# Altium PCB Micro y BT.PcbDoc
Units mil, origin at the board's own origin, x right, y up, seen from the top; angles counter-clockwise.
Board outline 6000 x 4000 mil, 2 copper layers (Top Layer, Bottom Layer); 49 components, 222 nets, 218 pads, 10 vias.
Unrouted connection lines stored in the file: 95.
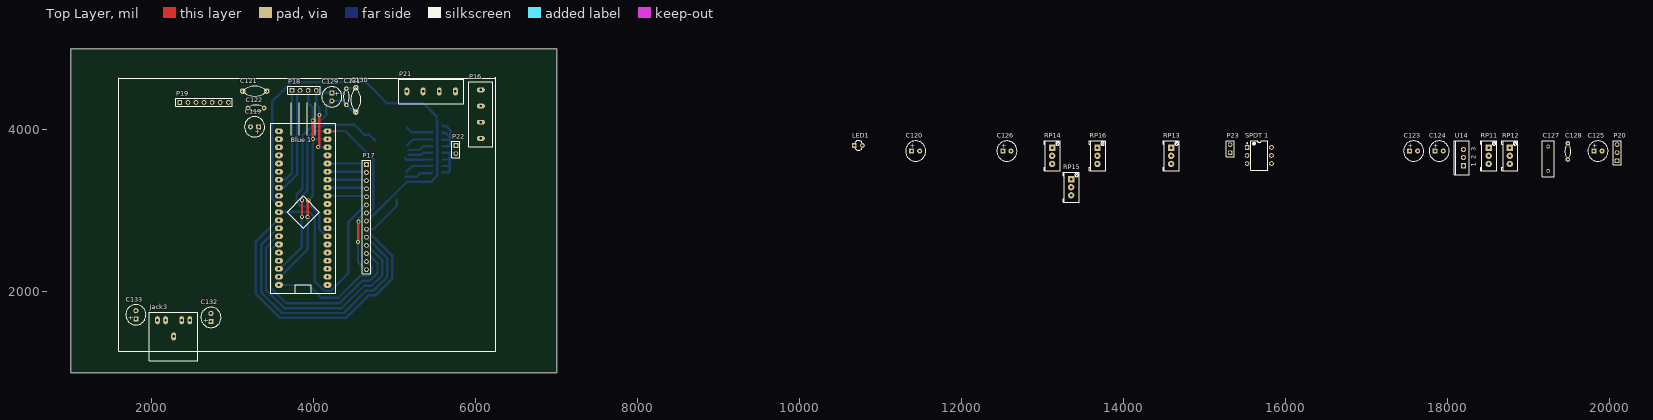
[diagram p0: Top Layer view]
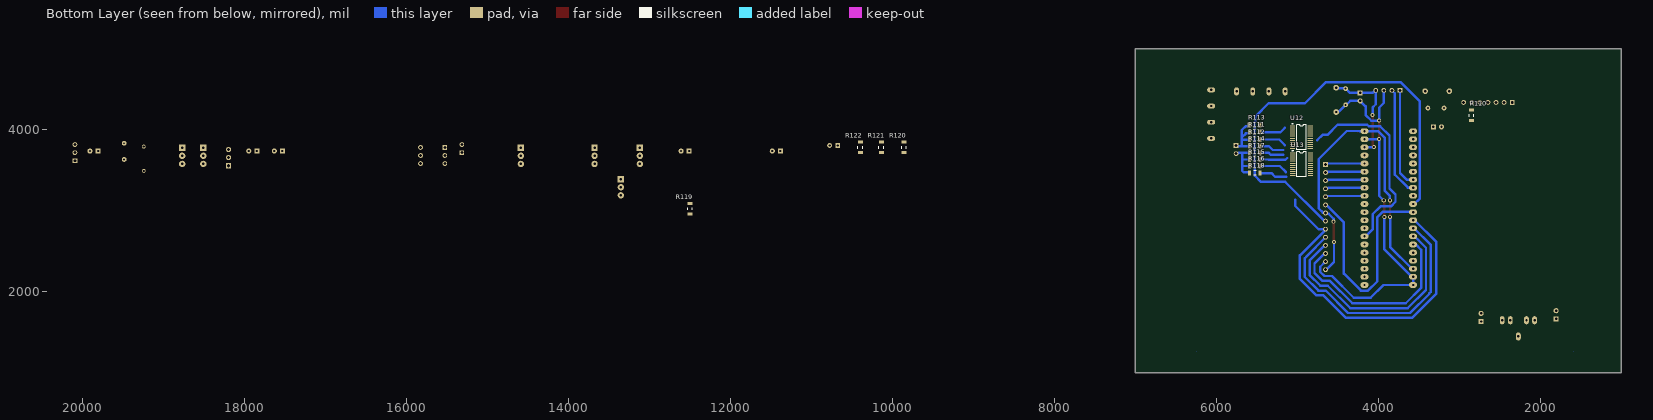
[diagram p1: Bottom Layer view, seen from below]

## Layer stack, top to bottom
Top Solder: solder mask 0.4, Solder Resist, Dk 3.5
Top Layer: signal copper 1.4
Dielectric 1: dielectric 12.6, FR-4, Dk 4.8
Bottom Layer: signal copper 1.4
Bottom Solder: solder mask 0.4, Solder Resist, Dk 3.5

## Board outline
1000,1000 7000,1000 7000,5000 1000,5000

## Design rules (kind name [scope] priority, off if disabled: settings)
Clearance [All] p1: gap=20 ignorepadtopadclearanceinfootprint=TRUE except(0: Arc-Hole Track-Hole SMDPad-Hole THPad-Hole Via-Hole Fill-Hole Poly-Hole Region-Hole Text-Hole; 30: Track-Track)
PolygonConnect [All] p1: connectstyle=Relief reliefconductorwidth=10 reliefentries=4 polygonreliefangle="90 Angle" airgapwidth=10
RoutingLayers RoutingLayers_1 [All] p1: top layer_v5=TRUE bottom layer_v5=TRUE
RoutingLayers [All] p2: top layer_v5=TRUE bottom layer_v5=TRUE
RoutingVias [All] p1: holewidth=28 width=50 viastyle="Through Hole" minholewidth=28 minwidth=50 maxholewidth=28 maxwidth=50
SolderMaskExpansion [All] p1: expansion=4 istentingtop=FALSE
Width [All] p1: maxlimit=30 minlimit=30 preferedwidth=30 minimp=50.000000 maximp=50.000000 favimp=50.000000
29 further rules are at their usual default settings.

## Classes and differential pairs
component class "Micro y BT": "Blue 1" C129 C130 C131 P18
component class Triangular: U4
component class "Positive Pwr": *1
component class "Pasa Banda Superior": C94 C95 C104 C105 C109 C110
component class "Pasa Banda Inferior": C80 C81 C82 C83 C84 C87 C88
component class "Pasa Bajos": C67 C68 C69 C72
component class "Pasa Altos": C59 C60 C61 C62 C65 C66
component class "Negative Pwr": *2

## Components (designator, comment, footprint, x,y, rotation, side; value= is the part's Value field where it differs from the comment)
"Blue 1" "Bluepill" Bluepill 3870,2984 r0 top
C119 "Cap Pol1" "CAPR D250 H450 R100 mil" 3269,4037 r180 top value=10uF
C120 "Cap Pol1" "CAPR D250 H450 R100 mil" 11434,3738 r0 top value=10uF
C121 "Cap" "cap 3" 3271,4478 r0 top value=10nF
C122 "Cap" "CAP DISCO 200mil" 3287,4269 r0 top value=100nF
C123 "Cap Pol1" "CAPR D250 H450 R100 mil" 17584,3738 r0 top value=10uF
C124 "Cap Pol1" "CAPR D250 H450 R100 mil" 17900,3738 r0 top value=10uF
C125 "Cap Pol1" "CAPR D250 H450 R100 mil" 19861,3738 r0 top value=10uF
C126 "Cap Pol1" "CAPR D250 H450 R100 mil" 12561,3738 r0 top value=10uF
C127 "Cap" RAD-0.3 19246,3643 r90 top value=10nF
C128 "Cap" "CAP DISCO 200mil" 19489,3734 r90 top value=100nF
C129 "Cap Pol1" "CAPR D250 H450 R100 mil" 4223,4407 r270 top value=10uF
C130 "Cap" "cap 3" 4520,4370 r90 top value=10nF
C131 "Cap" "CAP DISCO 200mil" 4402,4409 r90 top value=100nF
C132 "Cap Pol1" "CAPR D250 H450 R100 mil" 2730,1683 r90 top value=10uF
C133 "Cap Pol1" "CAPR D250 H450 R100 mil" 1803,1716 r90 top value=10uF
Jack3 "Jack 3.5mm" "jack 3.5mm" 2469,1648 r180 top
LED1 "Diodo Led" "Led 3mm AMARILLO" 10726,3807 r0 top
P16 "Filter In" "Bornera 4" 6063,4494 r270 top
P17 "Pantalla" HDR1X14 4651,3573 r270 top
P18 "Bluetooth Serial" HDR1X4 3731,4488 r0 top
P19 "Bluetooth Audio" HDR1X7 2345,4339 r0 top
P20 "Power" HDR1X3 20097,3618 r90 top
P21 "Filter In" "Bornera 4" 5150,4475 r0 top
P22 "Header 2" HDR1X2 5755,3806 r270 top
P23 "Filter Out" HDR1X2 15318,3718 r90 top
R110 "Res2" "1206 resistor" 2848,4178 r90 bottom value=1K
R111 "Res SMD" "1206 resistor" 5525,3969 r0 bottom
R112 "Res SMD" "1206 resistor" 5526,3879 r0 bottom
R113 "Res SMD" "1206 resistor" 5527,4057 r0 bottom
R114 "Res SMD" "1206 resistor" 5525,3796 r0 bottom
R115 "Res SMD" "1206 resistor" 5524,3632 r0 bottom
R116 "Res SMD" "1206 resistor" 5524,3551 r0 bottom
R117 "Res SMD" "1206 resistor" 5524,3713 r0 bottom
R118 "Res SMD" "1206 resistor" 5523,3467 r0 bottom
R119 "Res2" "1206 resistor" 12503,3024 r90 bottom value=47K
R120 "Res2" "1206 resistor" 9859,3782 r90 bottom value=47K
R121 "Res2" "1206 resistor" 10139,3782 r90 bottom value=47K
R122 "Res2" "1206 resistor" 10399,3782 r90 bottom value=47K
RP11 "Trimpot" "Trimpot Multivuelta Vertical" 18511,3679 r90 top
RP12 "Trimpot" "Trimpot Multivuelta Vertical" 18772,3679 r90 top
RP13 "Trimpot" "Trimpot Multivuelta Vertical" 14589,3679 r90 top
RP14 "Trimpot" "Trimpot Multivuelta Vertical" 13119,3679 r90 top
RP15 "Trimpot" "Trimpot Multivuelta Vertical" 13354,3291 r90 top
RP16 "Trimpot" "Trimpot Multivuelta Vertical" 13679,3679 r90 top
"SPDT 1" "SPDT on off" DIP-6 15678,3683 r0 top
U12 "AD5206" 948H-01 4948.25,3908.2 r270 bottom
U13 "AD5206" 948H-01 4947.25,3573.98 r270 bottom
U14 "LM7805" TO-220_FullPak 18199,3657 r90 top

## Footprints (in the part's own frame and the unit in brackets; to place one, negate y for a bottom-side part, rotate by r counter-clockwise, add the part's x,y. Pads: shape width x height; smd on the part's side, far side on the other; paste and mask are expansions set on the pad)
948H-01 [mm] "Shrink Small Outline; 24 Leads; Body Width 4.4 mm; Pitch 0.65 mm"
  rect 0.3x1.65 smd: 1(-3.575,-2.775) 2(-2.925,-2.775) 3(-2.275,-2.775) 4(-1.625,-2.775) 5(-0.975,-2.775) 6(-0.325,-2.775) 7(0.325,-2.775) 8(0.975,-2.775) 9(1.625,-2.775) 10(2.275,-2.775) 11(2.925,-2.775) 12(3.575,-2.775) 13(3.575,2.775) 14(2.925,2.775) 15(2.275,2.775) 16(1.625,2.775) 17(0.975,2.775) 18(0.325,2.775) 19(-0.325,2.775) 20(-0.975,2.775) 21(-1.625,2.775) 22(-2.275,2.775) 23(-2.925,2.775) 24(-3.575,2.775)
  silkscreen extent -4.4,-2.9 3.95,1.55
"1206 resistor" [mil]
  rect 39x61 smd: 1(-63,-2) 2(66,-2)
  silkscreen extent -14,-30 16,27
Bluepill [mil]
  oval 100x70 hole 30: 1(-300,1000) 2(-300,900) 3(-300,800) 4(-300,700) 5(-300,600) 6(-300,500) 7(-300,400) 8(-300,300) 9(-300,200) 10(-300,100) 11(-300,0) 12(-300,-100) 13(-300,-200) 14(-300,-300) 15(-300,-400) 16(-300,-500) 17(-300,-600) 18(-300,-700) 19(-300,-800) 20(-300,-900) 21(300,-900) 22(300,-800) 23(300,-700) 24(300,-600) 25(300,-500) 26(300,-400) 27(300,-300) 28(300,-200) 29(300,-100) 30(300,0) 31(300,100) 32(300,200) 33(300,300) 34(300,400) 35(300,500) 36(300,600) 37(300,700) 38(300,800) 39(300,900) 40(300,1000)
  silkscreen extent -400,-1000 400,1350
"Bornera 4" [mil]
  oval 60x100 hole 30: 1(0,0) 2(200,0) 3(400,0) 4(600,0)
  silkscreen extent -100,-150 700,150
"cap 3" [mil]
  round 70 hole 30: 1(-150,0) 2(150,0)
  silkscreen extent -150,-62 150,62
"CAP DISCO 200mil" [mm] "Capacitor; 2 Leads"
  round 1.5 hole 0.6: 1(-2.54,0) 2(2.54,0)
  silkscreen extent -1.74,-0.93 1.74,0.93, body extent -3.5,-0.85 3.49,0.85, height 7.5
"CAPR D250 H450 R100 mil" [mm]
  rect 1.6x1.6 hole 0.75: 1(-1.27,0)
  round 1.6 hole 0.75: 2(1.27,0)
  silkscreen extent -3.17,-3.17 3.17,3.17, body extent -3.4,-3.39 3.37,3.39, height 2.49
DIP-6 [mm] "DIP; 6 Leads; Row Spacing 7.62 mm; Pitch 2.54 mm"
  rect 1.5x1.5 hole 0.9: 1(-3.81,2.54)
  round 1.5 hole 0.9: 2(-3.81,0) 3(-3.81,-2.54) 4(3.81,-2.54) 5(3.81,0) 6(3.81,2.54)
  silkscreen extent -3.93,-4.7 2.65,4.7, body extent -3.55,-4.7 3.55,4.7, height 5.46
HDR1X2 [mm] "Connector; Header; 2 Position"
  rect 1.5x1.5 hole 0.9: 1(0,0)
  round 1.5 hole 0.9: 2(2.54,0)
  silkscreen extent -1.27,-1.27 3.81,1.27
HDR1X3 [mm] "Connector; Header; 3 Position"
  rect 1.5x1.5 hole 0.9: 1(0,0)
  round 1.5 hole 0.9: 2(2.54,0) 3(5.08,0)
  silkscreen extent -1.27,-1.27 6.35,1.27
HDR1X4 [mm] "Connector; Header; 4 Position"
  rect 1.5x1.5 hole 0.9: 1(0,0)
  round 1.5 hole 0.9: 2(2.54,0) 3(5.08,0) 4(7.62,0)
  silkscreen extent -1.27,-1.27 8.89,1.27
HDR1X7 [mm] "Connector; Header; 7 Position"
  rect 1.5x1.5 hole 0.9: 1(0,0)
  round 1.5 hole 0.9: 2(2.54,0) 3(5.08,0) 4(7.62,0) 5(10.16,0) 6(12.7,0) 7(15.24,0)
  silkscreen extent -1.27,-1.27 16.51,1.27
HDR1X14 [mm] "Connector; Header; 14 Position"
  rect 1.5x1.5 hole 0.9: 1(0,0)
  round 1.5 hole 0.9: 2(2.54,0) 3(5.08,0) 4(7.62,0) 5(10.16,0) 6(12.7,0) 7(15.24,0) 8(17.78,0) 9(20.32,0) 10(22.86,0) 11(25.4,0) 12(27.94,0) 13(30.48,0) 14(33.02,0)
  silkscreen extent -1.27,-1.27 34.29,1.27
"jack 3.5mm" [mil]
  oval 60x100 hole 30: 1(0,0) 1(100,0) 2(300,0) 2(400,0) 3(200,200)
  Top Layer region: 400,400
  silkscreen extent -100,-100 500,500
"Led 3mm AMARILLO" [mm]
  rect 1.5x1.5 hole 0.75: 1(-1.27,0)
  round 1.5 hole 0.75: 2(1.27,0)
  silkscreen extent -1.18,-1.5 1,1.5, body extent -1.65,-1.65 1.65,1.64, height 5.51
RAD-0.3 [mm] "Radial Cap, Thru-Hole; 2 Leads; 0.3 in Pin Spacing"
  round 1.2 hole 0.7: 1(-3.81,0) 2(3.81,0)
  silkscreen extent -5.71,-1.91 5.71,1.91
TO-220_FullPak [mm] "TO, Thru-Hole, Vertical, Heatsink Mounted; 3 In-Line Leads; Pitch 2.54 mm"
  rect 1.6x1.6 hole 1: 1(-2.54,0)
  round 1.6 hole 1: 2(0,0) 3(2.54,0)
  silkscreen extent -5.35,-1.85 5.35,2.85
"Trimpot Multivuelta Vertical" [mm] "Preset Multivuelta de ajuste vertical"
  rect 2x2 hole 0.75: 1(2.54,0)
  round 2 hole 0.75: 2(-2.54,0) 3(0,0)
  silkscreen extent -4.75,-2.54 4.75,2.54, body extent -4.6,-2.41 4.6,2.39, height 12.06

## Part data
C119 C120 C123 C124 C125 C126 C129 C132 C133: "Polarized Capacitor (Radial)", LatestRevisionDate=17-Jul-2002, LatestRevisionNote="Re-released for DXP Platform.", PackageDescription="Polarized Capacitor (Radial); 2 Leads", PackageReference=RB7.6-15, Published=8-Jun-2000, Publisher="Altium Limited"
C121 C122 C127 C128 C130 C131: "Capacitor", LatestRevisionDate=17-Jul-2002, LatestRevisionNote="Re-released for DXP Platform.", PackageDescription="Radial Cap, Thru-Hole; 2 Leads; 0.3 in Pin Spacing", PackageReference=RAD-0.3, Published=8-Jun-2000, Publisher="Altium Limited"
LED1: "Led 3mm", FABRICANTE=Generico, VALOR="Led Xmm (COLOR)"
P16 P18 P21: library part MHDR1X4, "Header, 4-Pin", LatestRevisionDate=17-Jul-2002, LatestRevisionNote="Re-released for DXP Platform.", Publisher="Altium Limited"
P17: library part "Header 14", "Header, 14-Pin", LatestRevisionDate=17-Jul-2002, LatestRevisionNote="Re-released for DXP Platform.", Publisher="Altium Limited"
P19: library part "Header 7", "Header, 7-Pin", LatestRevisionDate=17-Jul-2002, LatestRevisionNote="Re-released for DXP Platform.", Publisher="Altium Limited"
P20: library part "Header 3", "Header, 3-Pin", LatestRevisionDate=17-Jul-2002, LatestRevisionNote="Re-released for DXP Platform.", Publisher="Altium Limited"
P22: "Header, 2-Pin", LatestRevisionDate=17-Jul-2002, LatestRevisionNote="Re-released for DXP Platform.", Publisher="Altium Limited"
P23: library part "Header 2", "Header, 2-Pin", LatestRevisionDate=17-Jul-2002, LatestRevisionNote="Re-released for DXP Platform.", Publisher="Altium Limited"
R110 R119 R120 R121 R122: "Resistor", LatestRevisionDate=17-Jul-2002, LatestRevisionNote="Re-released for DXP Platform.", PackageDescription="Axial Device, Thru-Hole; 2 Leads; 0.4 in Pin Spacing", PackageReference=AXIAL-0.4, Published=8-Jun-2000, Publisher="Altium Limited"
R111 R112 R113 R114 R115 R116 R117 R118: "Res Smd", VALOR=10K
RP11 RP12 RP13 RP14 RP15 RP16: "Preset"
  RP11 RP12: VALOR=1K
  RP13 RP14 RP15 RP16: VALOR=10K
U14: library part LM78L12ACZ, "3-Terminal Positive Regulators, 3-pin TO-92", Manufacturer="National Semiconductor", PackageTopMarking=NSXYTT*LM78L*12ACZ, PowerWise=N, Supplier Part Number 1=9490272, Code_JEDEC=TO-226-AA, ComponentLink1Description="LM78L12 Datasheet", ComponentLink1URL=http://www.national.com/ds/LM/LM78L12.pdf, ComponentLink2Description="LM78L12 Web Page", ComponentLink2URL=http://www.national.com/pf/LM/LM78L12.html, ComponentLink3Description="Z03A Package Page", ComponentLink3URL=http://www.national.com/packaging/folders/z03a.html, CompType="LDO IC", DatasheetVersion=Apr-2006, PackageDescription="TO-92, Molded, 3 Lead", PackageReference=Z03A, PackageVersion="revG, Sep-2000", PartNumber=LM78L12ACZ, PinCount=3, Published=4-Dec-2008, Publisher="Altium Limited", RoHS=N, Supplier 1=Farnell

## Via types
v1: diameter 50, hole 28, Top Layer to Bottom Layer, 10 vias

## Nets (pads, with @x,y where several pads share a name; then routed paths per layer and width w, separated by ;. In a path a pad name is that pad's centre, name@x,y a point inside that pad or via, vN(x,y) a via of type N, cw(c..) or ccw(c..) an arc to the next point about the centre after c; other vN are vias at no path point)
3.3V: "Blue 1.18" "Blue 1.40" C125.1 C127.2 C128.2 P17.7 P17.14 | length 4291.2
  Top Layer w30: v1(3854,2926) 3854.5,2926.5 3854.5,3128.5 v1(3855,3129) ; 4254,3986 4255,3985 ; v1(4546,2615) 4549,2618 4549,2863 v1(4552,2866)
  Bottom Layer w30: 3570,2284 3585,2284 3854,2553 v1(3854,2926) ; v1(3855,3129) 3858.83,3132.83 3858.83,3187.97 3921,3250.15 3921,3903.85 4001.15,3984 4228,3984 4229.77,3985.77 4388.23,3985.77 4737,3637 4737,3032 4683.56,2978.56 4656.56,2978.56 P17.7 ; v1(4546,2615) 4546,2365.53 4638.53,2273 P17.14 ; v1(4552,2866) 4552,2901.28 4613.72,2963 4626.19,2963 P17.7@4643.59,2980.41
3V: RP11.3 U12.6 U13.6
5V: "Blue 1.38" C119.1 C121.2 C122.2 C124.1 C129.1 C130.2 C131.2 P18.4 P19.1 U14.3 | length 1372
  Top Layer w30: v1(4055,3788) 4070,3803 v1(4070,4182) ; C131.2 C131.2@4404.5,4509 ; C130.2@4517.5,4520 C130.2
  Bottom Layer w30: v1(4055,3788) 4057,3786 4168,3786 4170,3784 ; v1(4070,4182) 4070,4277.07 4031,4316.07 P18.4 4038.86,4488 4069.86,4457 C129.1 4348.6,4457 4400.6,4509 C131.2 4407.5,4514.5 4514.5,4514.5 C130.2
12V: C123.1 P20.3 RP11.1 U14.1
32V: 
-3V: RP12.3 U12.9 U13.9
-12V: P20.1 RP12.1
-20V: 
-32V: 
A0: "Blue 1.5" U13.5
A2: "Blue 1.7" P18.1 | length 1216.2
  Bottom Layer w30: 3570,3384 3571,3385 3648.63,3385 3731,3467.37 P18.1
A3: "Blue 1.8" P18.2 | length 1348.7
  Bottom Layer w30: 3570,3284 3571.91,3285.91 3634.4,3285.91 3795.53,3447.04 3795.53,4452.53 P18.2
A5: "Blue 1.10" P17.8 U12.8 U13.8 | length 5456.5
  Bottom Layer w30: 3570,3084 3555,3084 3485,3154 3485,4350.55 3724.45,4590 4644.99,4590 4906.48,4328.51 5353.49,4328.51 5516,4166 5516,4106.5 5523,4099.5 5523,3432.5 5448.5,3358 5147.85,3358 4668.41,2878.56 4656.56,2878.56 P17.8
A6: "Blue 1.11" P17.6 | length 2759
  Bottom Layer w30: 3570,2984 3572,2986 3946.85,2986 4010,2922.85 4010,2130.01 4126.01,2014 4213.99,2014 4423.65,2223.66 4423.65,2857.78 4633.31,3067.44 4645.44,3067.44 P17.6
A7: "Blue 1.12" P17.9 U12.7 U13.7 | length 4354.9
  Bottom Layer w30: 3570,2884 3550.15,2884 3286,2619.85 3286,1973.15 3581.15,1678 4399,1678 4675.68,1954.68 4763.35,1954.68 4966.81,2158.14 4966.81,2448.45 4665.53,2749.73 4665.53,2750.61 4651,2765.14 P17.9 4737.85,2773 5025,3060.15 5025,3134.34
A10: "Blue 1.27" U12.5 | length 2543.7
  Bottom Layer w30: 4170,2684 4155,2684 4070,2769 4070,2956.85 3971.85,3055 3844.15,3055 3787,3112.15 3787,3201 3861,3275 3861,3928.71 3976.29,4044 4116.01,4044 4134.86,4062.86 4501.35,4062.86 4627.49,3936.72 4688.28,3936.72 4752.64,3872.36
B0: "Blue 1.13" P17.10 | length 3332.5
  Bottom Layer w30: 3570,2784 3556.01,2784 3350,2577.99 3350,1999.09 3368,1981.09 3368,1976 3606,1738 4372,1738 4648.68,2014.68 4738.5,2014.68 4906.81,2182.99 4906.81,2412.94 4888,2431.75 4888,2436 P17.10
B1: "Blue 1.14" P17.11 | length 2890.9
  Bottom Layer w30: 3570,2684 3549.94,2684 3508.03,2642.09 3410,2544.06 3410,2023.94 3635.94,1798 4346,1798 4622.68,2074.68 4713.64,2074.68 4846.81,2207.85 4846.81,2388.09 4676.43,2558.47 4673.39,2558.47 4658.86,2573 P17.11
B4: "Blue 1.32" P17.5 | length 485.6
  Bottom Layer w30: 4170,3184 4171,3183 4641,3183 P17.5
B5: "Blue 1.33" P17.4 | length 485.6
  Bottom Layer w30: 4170,3284 4619.45,3284 4624.9,3278.56 4645.44,3278.56 P17.4
B6: "Blue 1.34" P17.3 | length 485.6
  Bottom Layer w30: 4170,3384 4619.45,3384 4624.9,3378.56 4645.44,3378.56 P17.3
B7: "Blue 1.35" P17.2 | length 485.6
  Bottom Layer w30: 4170,3484 4619.45,3484 4624.9,3478.56 4645.44,3478.56 P17.2
B8: "Blue 1.36" P17.1 | length 485.6
  Bottom Layer w30: 4170,3584 4640,3584 P17.1
B10: "Blue 1.15" P17.12 | length 2452.2
  Bottom Layer w30: 3570,2584 3568.09,2582.09 3532.88,2582.09 3470,2519.21 3470,2048.79 3660.79,1858 4320,1858 4596.68,2134.68 4688.79,2134.68 4786.81,2232.7 4786.81,2349.66 4663.47,2473 P17.12
GND: "Blue 1.19" "Blue 1.20" "Blue 1.39" C119.2 C121.1 C122.1 C123.2 C124.2 C125.2 C127.1 C128.1 C129.2 C130.1 C131.1 Jack3.3 LED1.2 P17.13 P18.3 P19.2 P20.2 R119.1 R120.1 R121.1 R122.1 RP11.2 RP12.2 RP13.1 RP14.1 RP15.1 RP16.1 U12.3 U12.4 U12.10 U12.13 U12.16 U12.21 U12.24 U13.3 U13.4 U13.10 U13.13 U13.16 U13.21 U13.24 U14.2 | length 5041.5
  Top Layer w30: v1(3924,2924) 3924,3115.59 3932,3123.59 v1(3932,3129) ; v1(3988,3886) v1(3988,4114)
  Bottom Layer w30: v1(3924,2924) 3924,2523 3585,2184 3570,2184 3570,2084 3936,2084 4094,1926 4303,1926 4571.68,2194.68 4663.94,2194.68 4715.53,2246.27 4715.53,2308.47 P17.13 ; P18.3 3931,4331.22 3988,4274.22 v1(3988,4114) 4086.85,4114 4155.77,4182.92 4155.77,4289.77 C129.2 4346.14,4357 4394.14,4309 C131.1 4483.35,4227.65 4512.35,4227.65 C130.1 ; v1(3932,3129) 3988,3185 v1(3988,3886) 3989,3885 4169,3885 4170,3884
JackL: "SPDT 1.6" RP16.2
Net1_2: 
Net1_3: 
Net1_4: 
Net1_6: 
Net1_7: 
Net1_10: 
Net1_11: 
Net1_12: 
Net*1_1: 
Net*1_2: 
Net*1_3: 
Net*1_4: 
Net*1_5: 
Net*1_6: 
Net*2_2: 
Net*2_4: 
Net*2_5: 
Net*2_6: 
NetB1_1: 
NetB1_3: 
NetC21_1: 
NetC22_1: 
NetC22_2: 
NetC23_1: 
NetC23_2: 
NetC24_1: 
NetC24_2: 
NetC29_2: 
NetC30_1: 
NetC30_2: 
NetC33_1: 
NetC33_2: 
NetC34_2: 
NetC35_2: 
NetC38_2: 
NetC44_1: 
NetC45_1: 
NetC48_1: 
NetC49_2: 
NetC51_1: 
NetC55_1: 
NetC56_2: 
NetC58_2: 
NetC59_1: 
NetC59_2: 
NetC60_1: 
NetC61_1: 
NetC61_2: 
NetC62_1: 
NetC67_1: 
NetC67_2: 
NetC68_1: 
NetC68_2: 
NetC71_1: 
NetC72_2: 
NetC77_1: 
NetC77_2: 
NetC78_1: 
NetC79_1: 
NetC79_2: 
NetC82_1: 
NetC82_2: 
NetC84_1: 
NetC85_1: 
NetC85_2: 
NetC93_1: 
NetC93_2: 
NetC94_1: 
NetC95_1: 
NetC95_2: 
NetC96_1: 
NetC96_2: 
NetC101_1: 
NetC102_1: 
NetC102_2: 
NetC117_2: 
NetC118_2: 
NetC120_1: C120.1 P19.3
NetC120_2: C120.2 R120.2
NetC126_1: C126.1 P19.4
NetC126_2: C126.2 R119.2
NetC132_1: C132.1 Jack3.1
NetC132_2: C132.2 R121.2
NetC133_1: C133.1 Jack3.2
NetC133_2: C133.2 R122.2
NetD1_2: 
NetD1_4: 
NetD8_1: 
NetD8_2: 
NetD10_1: 
NetD10_2: 
NetD12_2: 
NetD13_2: 
NetD16_2: 
NetD18_2: 
NetD19_2: 
NetD22_2: 
NetF1_1: 
NetF1_2: 
NetJack2_1: 
NetLED1_1: LED1.1 R110.1
NetP7_1: 
NetP7_2: 
NetP7_3: 
NetP10_1: 
NetP12_1: 
NetP13_1: 
NetP14_2: 
NetP15_1: 
NetP15_2: 
NetP15_3: 
NetP15_4: 
NetP19_6: P19.6 R110.2
NetP22_1: P22.1 R111.2 R112.2 R113.2 R114.2 | length 706.1
  Bottom Layer w30: R114.2 5685,3798 ; R112.2 5592,3880.5 5596.5,3876 5685,3876 ; R111.2@5592,3972 R111.2 5591,3961 5595.5,3956.5 5634.5,3956.5 5685,3906 5685,3996 5634.5,4046.5 5597.5,4046.5 5593,4051 R113.2 R113.2@5592,4058 ; 5685,3899 5685,3876 ; P22.1 5747,3798 5685,3798 ; 5685,3798 5685,3876
NetP22_2: P22.2 R115.2 R116.2 R117.2 R118.2 | length 671.9
  Bottom Layer w30: R118.2 5589,3473 5593.5,3477.5 5664,3477.5 5681.57,3495.07 5681.57,3553 5681.57,3634 5681.57,3648.43 ; R116.2 5673,3553 ; R115.2 5667.15,3634 5681.57,3648.43 ; R117.2 5717.67,3715 5718.11,3714.56 5725.9,3714.56 5728.9,3711.56 5749.44,3711.56 P22.2 ; 5681.57,3712 5681.57,3648.43
NetP23_1: "SPDT 1.2" P23.1
NetP23_2: "SPDT 1.5" P23.2
NetQ1_1: 
NetQ1_2: 
NetR7_1: 
NetR9_2: 
NetR17_1: 
NetR21_1: 
NetR25_1: 
NetR27_2: 
NetR28_1: 
NetR29_1: 
NetR30_1: 
NetR32_2: 
NetR33_2: 
NetR36_2: 
NetR38_2: 
NetR39_2: 
NetR41_1: 
NetR45_1: 
NetR46_1: 
NetR47_1: 
NetR48_1: 
NetR50_2: 
NetR51_2: 
NetR52_2: 
NetR53_2: 
NetR54_2: 
NetR55_2: 
NetR56_1: 
NetR60_2: 
NetR62_1: 
NetR66_1: 
NetR67_1: 
NetR68_1: 
NetR72_2: 
NetR74_1: 
NetR75_1: 
NetR76_1: 
NetR77_1: 
NetR79_2: 
NetR80_2: 
NetR81_2: 
NetR82_2: 
NetR83_2: 
NetR84_1: 
NetR86_1: 
NetR88_2: 
NetR90_2: 
NetR92_1: 
NetR96_1: 
NetR97_1: 
NetR98_1: 
NetR100_1: 
NetR106_1: 
NetRP1_3: 
NetRP2_3: 
NetRP3_1: 
NetRP13_2: "SPDT 1.1" RP13.2
NetRP13_3: RP13.3
NetRP14_2: "SPDT 1.4" RP14.2
NetRP14_3: RP14.3
NetRP15_2: "SPDT 1.3" RP15.2
NetRP15_3: RP15.3
NetRP16_3: RP16.3
R1_a: P16.4 U12.1
R1_b: R111.1 U12.2 | length 330
  Bottom Layer w30: 5154,4024 5207,3971 R111.1
R2_a: P16.3 U12.12
R2_b: R112.1 U12.11 | length 340.4
  Bottom Layer w30: 5152,3810 5223,3881 R112.1
R3_a: P16.2 U12.22
R3_b: R113.1 U12.23
R4_a: P16.1 U12.15
R4_b: R114.1 U12.14 | length 308.5
  Bottom Layer w30: 5173,3751 5302,3751 5349,3798 R114.1
R5_a: P21.4 U13.1
R5_b: R115.1 U13.2 | length 347.3
  Bottom Layer w30: 5123.82,3652.33 5145.15,3631 5351.71,3631 5354.71,3634 R115.1
R6_a: P21.3 U13.12
R6_b: R116.1 U13.11 | length 351.1
  Bottom Layer w30: 5141,3478 5216,3553 R116.1
R7_a: P21.2 U13.22
R7_b: R117.1 U13.23 | length 303.4
  Bottom Layer w30: 5170,3691 5326.85,3691 5353.85,3718 5456.5,3718 5459.5,3715 R117.1
R8_a: P21.1 U13.15
R8_b: R118.1 U13.14 | length 344.1
  Bottom Layer w30: 5137,3418 5272.25,3418 5320.25,3466 5455.5,3466 5458.5,3469 R118.1
pads on no net: "Blue 1.1" "Blue 1.2" "Blue 1.3" "Blue 1.4" "Blue 1.6" "Blue 1.9" "Blue 1.16" "Blue 1.17" "Blue 1.21" "Blue 1.22" "Blue 1.23" "Blue 1.24" "Blue 1.25" "Blue 1.26" "Blue 1.28" "Blue 1.29" "Blue 1.30" "Blue 1.31" "Blue 1.37" P19.5 P19.7 U12.17 U12.18 U12.19 U12.20 U13.17 U13.18 U13.19 U13.20
copper on no net: | length 2.8
  Bottom Layer w10: 1591,1265 1592,1266 ; 6245,1265 6246,1266

## Silkscreen, mask and mechanical layers (free items; w line width, h text height)
Top Overlay:
  lines w10: 1591,1265 6245,1265 ; 1592,1266 1592,4641 ; 1595,4639 6236,4639 6246,4649 6246,1266

## Dimensions
1595,4639 to 6246,4649 on Top Overlay
1595,4639 to 1591,1265 on Top Overlay

## Text inside footprints (layer, text, board x,y; h text height)
C119: Top Overlay "+" at 3340,4002 h60 r180
C120: Top Overlay "+" at 11363,3773 h60
C123: Top Overlay "+" at 17513,3773 h60
C124: Top Overlay "+" at 17829,3773 h60
C125: Top Overlay "+" at 19790,3773 h60
C126: Top Overlay "+" at 12490,3773 h60
C129: Top Overlay "+" at 4258,4478 h60 r270
C132: Top Overlay "+" at 2695,1612 h60 r90
C133: Top Overlay "+" at 1768,1645 h60 r90
U14: Top Overlay "2" at 18349.59,3637.32 h59.06 r90; Top Overlay "1" at 18349.59,3547.16 h59.06 r90; Top Overlay "3" at 18349.59,3737.32 h59.06 r90